# EAGLE board emonDCduo-ESP v4.1 (EAGLE 9.4.0)
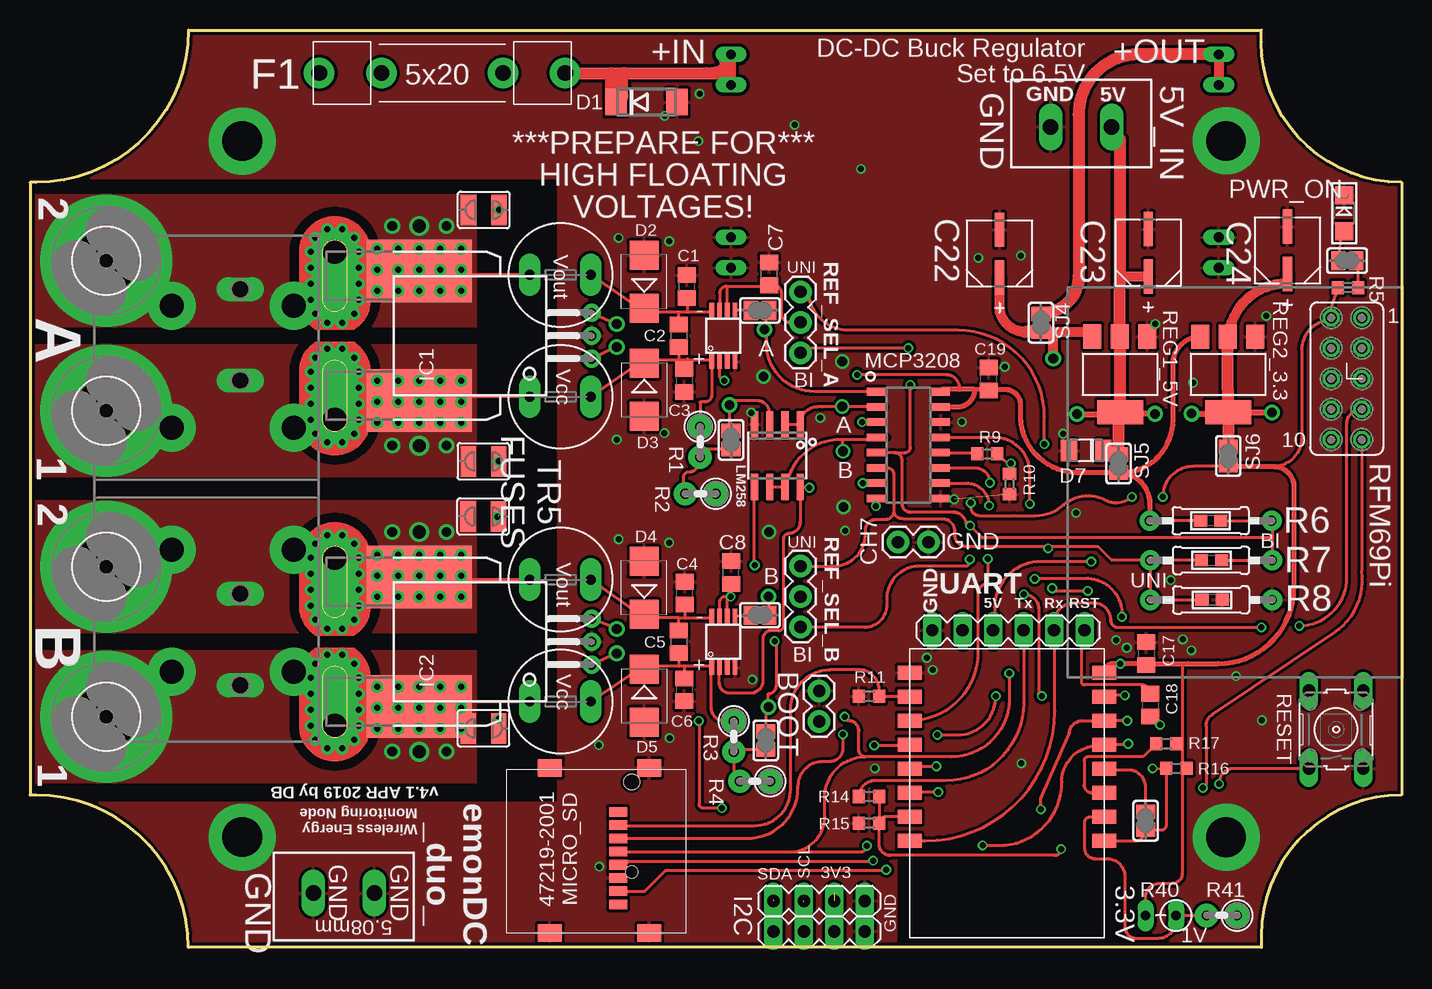
[diagram p0: board, top side]
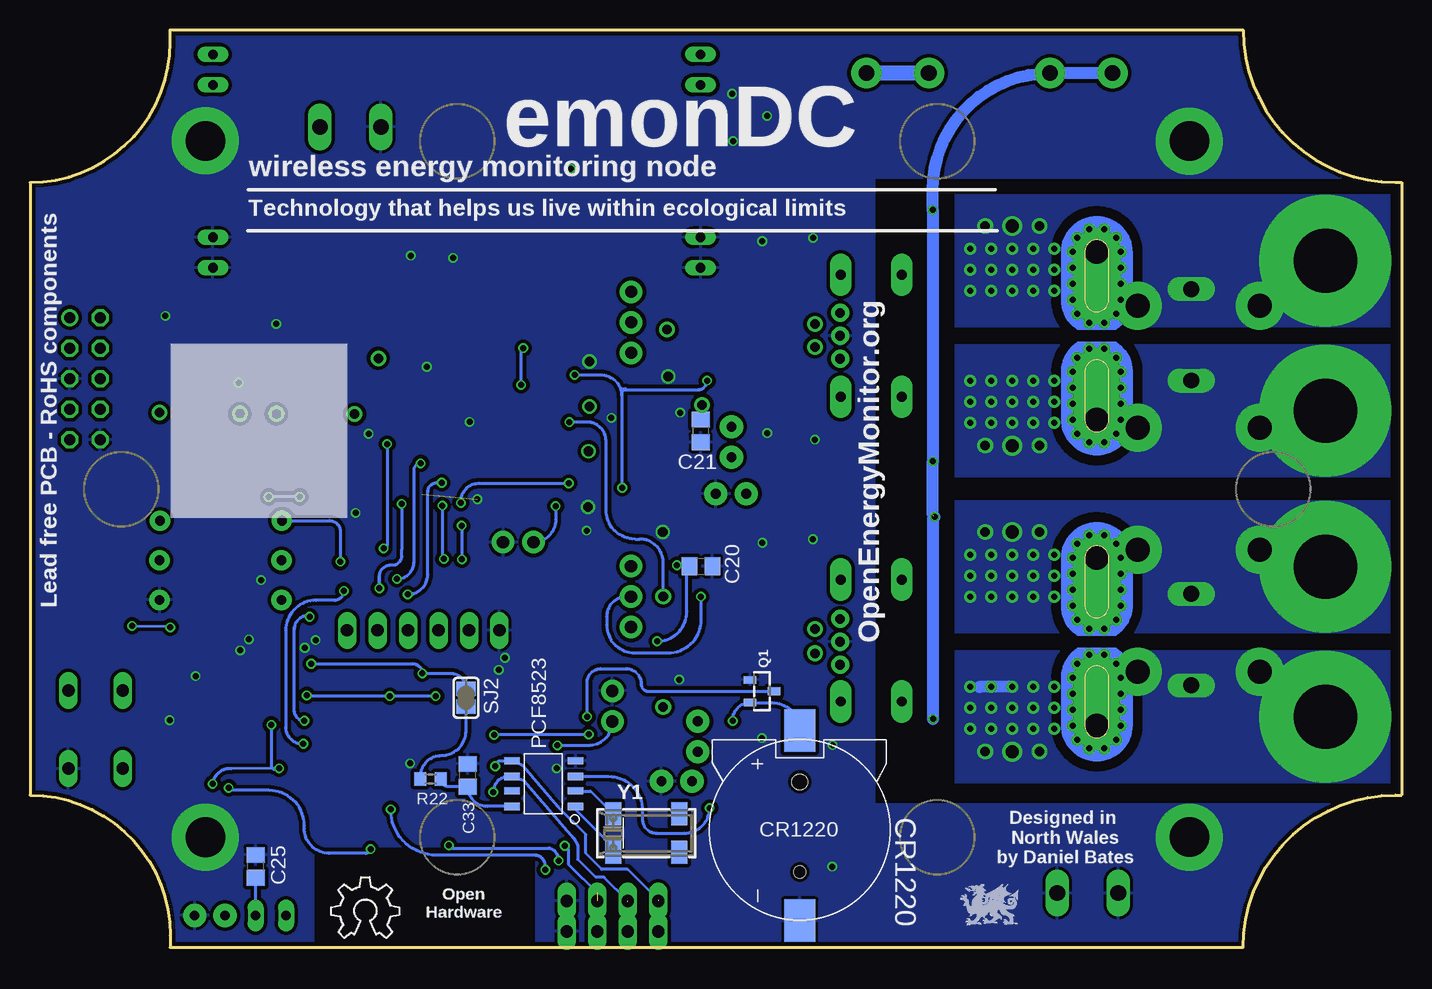
[diagram p1: board, bottom side, seen from below]

Size 114.3 x 76.45 mm. Coordinates in mm from the lower left corner, seen from the top.
Outline: 0,63.75 0,12.7 0.51,12.7 arc-90 13.21,0 102.62,0 102.62,1.02 arc-90 114.3,12.7 114.3,63.75 arc-90 102.62,75.44 102.62,76.45 13.21,76.45 arc-90 0.51,63.75 0,63.75
Copper layers (1*16): Top 0.07111875mm / dielectric 1.45776875mm / Bottom 0.07111875mm
Design rules "jlcpcb *": minimum track width 6mil, minimum drill 12mil, track to track 10mil, track to pad 10mil, pad to pad 10mil, via to via 10mil, smd to smd 0mil, copper to edge 10mil, drill to drill 10mil, minimum pad ring 10mil, minimum via ring 6mil, stop-mask expansion 2mil, vias tented up to drill 25mil, thermal gap 10mil
Net classes: 0 default: clearance 0.254 mm; 1 power: width 0.254 mm, clearance 0.254 mm; 2 thin_power: width 0.254 mm, clearance 0.254 mm; 3 thin_power2: width 0.254 mm, clearance 0.254 mm; 4 HV: clearance 0.762 mm
tRestrict: area 72.5,0.5 to 90.3,8.1
bRestrict: area 72.5,0.4 to 90.3,8

## Footprints (pad centres in the part's own frame; a part is rotated, then mirrored left to right if it is on the bottom)
1X02 = drill 1.016 pad 1.88: 1 0,0; 2 2.54,0
C0805 = smd 1.3 x 1.5: 1 -0.95,0; 2 0.95,0
CAPAE530X610N = smd 2.87 x 0.762: 1 -1.981,0; 2 1.981,0
CR1220SMD = smd 3.54 x 2.6: P+ 8.3,0; P- -7.55,0 | hole 1: -3.5,0 | hole 1.3: 4,0
DO214AA = smd 1.8 x 2.2: A 2.55,0; C -2.55,0
SMB = smd 2.4 x 2.4: A 2.2,0; C -2.2,0
SOD123F = smd 1.34 x 1.8: A 1.43,0; C -1.43,0
EBW_SERIES_15.2MM = smd 5.2 x 8.75: P$1 -5.4,0; P$2 5.4,0 | drill 0.5: P$3 -3.75,3.5; P$4 -3.75,1.75; P$5 -3.75,0; P$6 -3.75,-1.75; P$7 -3.75,-3.5; P$8 -5.5,3.5; P$9 -5.5,1.75; P$10 -5.5,0; P$11 -5.5,-1.75; P$12 -5.5,-3.5; P$13 -7.25,3.5; P$14 -7.25,1.75; P$15 -7.25,0; P$16 -7.25,-1.75; P$17 -7.25,-3.5; P$18 7.25,1.75; P$19 7.25,3.5; P$20 7.25,0; P$21 7.25,-1.75; P$22 7.25,-3.5; P$23 5.5,3.5; P$24 5.5,1.75; P$25 5.5,0; P$26 5.5,-1.75; P$27 5.5,-3.5; P$28 3.75,3.5; P$29 3.75,1.75; P$30 3.75,0; P$31 3.75,-1.75; P$32 3.75,-3.5 | drill 0.8: P$33 -9.155,2.258; P$35 -9.155,-2.258; P$36 9.155,2.258; P$38 9.155,-2.258 | drill 1.1: P$34 -9.155,0; P$37 9.155,0
ESP8266-ESP12 = smd 2 x 1.2: 1 16.2,2; 2 16.2,4; 3 16.2,6; 4 16.2,8; 5 16.2,10; 6 16.2,12; 7 16.2,14; 8 16.2,16; 9 0,16; 10 0,14; 11 0,12; 12 0,10; 13 0,8; 14 0,6; 15 0,4; 16 0,2
445/030_SERIES_LITTELFUSE = drill 1.3 pad 2.54: P$1 -10.25,0; P$2 -5.05,0; P$3 10.25,0; P$4 5.05,0
TR5 = drill 0.813 pad 1.778 long: 1 -2.54,0; 2 2.54,0
FE05-2_RFM69PI_OULTINE = drill 0.914: 1 24.511,29.972 | drill 0.914 octagon: 2 21.971,29.972; 3 24.511,27.432; 4 21.971,27.432; 5 24.511,24.892; 6 21.971,24.892; 7 24.511,22.352; 8 21.971,22.352; 9 24.511,19.812; 10 21.971,19.812
ACS75050 = drill 0.8 pad 1.5: 1 -1.91,-21.4; 2 0,-21.4; 3 1.91,-21.4 | drill 2 pad 4 offset: IP+ 7,0; IP- -7,0 | drill 0.5 pad 0.9: IP+@2 8.89,-0.635; IP+@3 8.89,0.635; IP+@4 8.175,1.625; IP+@5 7,2; IP+@6 5.675,2; IP+@7 4.325,2; IP+@8 3,2; IP+@9 1.825,1.625; IP+@10 1.1,0.625; IP+@11 1.1,-0.625; IP+@12 1.825,-1.625; IP+@13 3,-2; IP+@14 4.325,-2; IP+@15 5.675,-2; IP+@16 7,-2; IP+@17 8.175,-1.625; IP-@2 -8.89,-0.635; IP-@3 -8.89,0.635; IP-@4 -8.175,1.625; IP-@5 -7,2; IP-@6 -5.675,2; IP-@7 -4.325,2; IP-@8 -3,2; IP-@9 -1.825,1.625; IP-@10 -1.1,0.625; IP-@11 -1.1,-0.625; IP-@12 -1.825,-1.625; IP-@13 -3,-2; IP-@14 -4.35,-2; IP-@15 -5.675,-2; IP-@16 -7,-2; IP-@17 -8.175,-1.625
CHIPLED_1206 = smd 1.5 x 1.5: A 0,-1.496; C 0,1.496
SOIC8_150MIL = smd 0.6 x 2.2: 1 -1.905,-2.6; 2 -0.635,-2.6; 3 0.635,-2.6; 4 1.905,-2.6; 5 1.905,2.6; 6 0.635,2.6; 7 -0.635,2.6; 8 -1.905,2.6
SOIC16 = smd 0.635 x 1.524: 1 -4.445,-2.695; 2 -3.175,-2.695; 3 -1.905,-2.695; 4 -0.635,-2.695; 5 0.635,-2.695; 6 1.905,-2.695; 7 3.175,-2.695; 8 4.445,-2.695; 9 4.445,2.695; 10 3.175,2.695; 11 1.905,2.695; 12 0.635,2.695; 13 -0.635,2.695; 14 -1.905,2.695; 15 -3.175,2.695; 16 -4.445,2.695
5,3//11-PAD = drill 5.3 pad 11: B5,5 0,0
47219-2001_MICROSD = smd 1.45 x 2: P$1 0,0; P$2 13.75,0; P$3 0,8.3; P$4 13.75,8.3 | smd 0.8 x 1.5: PIN1 10.08,2.6; PIN2 8.98,2.6; PIN3 7.88,2.6; PIN4 6.78,2.6; PIN5 5.68,2.6; PIN6 4.58,2.6; PIN7 3.48,2.6; PIN8 2.38,2.6
2/10,16 = drill 2 pad 4: P$1 -5.08,0; P$2 -5.08,10.16; P$3 5.08,0; P$4 5.08,10.16
SOIC_8 = smd 1.3 x 0.6: 1 -2.6,1.9; 2 -2.6,0.6; 3 -2.6,-0.6; 4 -2.6,-1.9; 5 2.7,-1.9; 6 2.7,-0.6; 7 2.7,0.6; 8 2.7,1.9
SOT23-R = smd 0.635 x 1.016: 1 -0.95,-1; 2 0.95,-1; 3 0,1
0207/2V = drill 0.813 pad 1.93: 1 -1.27,0; 2 1.27,0
R0603 = smd 1 x 1.1: 1 -0.85,0; 2 0.85,0
0207/10 = drill 0.813 pad 1.676: 1 -5.08,0; 2 5.08,0
0603 = smd 1.1 x 1: 1 -0.85,0; 2 0.85,0
RS-2,5 = drill 0.813 long: 1 -1.27,0; 2 1.27,0
1X03 = drill 1.016 pad 1.88: 1 0,0; 2 2.54,0; 3 5.08,0
SOT223 = smd 1.499 x 2.007: 1 -2.261,-3.15; 2 0.025,-3.15; 3 2.311,-3.15 | smd 3.81 x 2.007: 4 0,3.15
B3F-10XX = drill 1.016 long: 1 -3.251,2.261; 2 3.251,2.261; 3 -3.251,-2.261; 4 3.251,-2.261
S-PDSO-G08 = smd 0.4 x 1.2: 1 -0.975,-2.157; 2 -0.325,-2.157; 3 0.325,-2.157; 4 0.975,-2.157; 5 0.975,2.157; 6 0.325,2.157; 7 -0.325,2.157; 8 -0.975,2.157
SJW = smd 1.27 x 2.54: 1 -1.27,0; 2 1.27,0
SOLDERJUMPER_CLOSEDWIRE = smd 1.168 x 1.6: 1 -0.762,0; 2 0.762,0 | smd 0.635 x 0.203: WIRE 0,0
MA04-1 = drill 1.016 long: 1 -3.81,0; 2 -1.27,0; 3 1.27,0; 4 3.81,0
P1-13Y = drill 1.321 pad 1.905 long: TP 0,0
TP0.8 = drill 0.8: P$1 0,0
TP0.8_X2 = drill 0.8 long: P$1 0,0; P$2 0,2.54
2/5.08 = drill 1.3 long: P$1 -2.54,0; P$3 2.54,0
MA06-1 = drill 1.016 long: 1 0,0; 2 2.54,0; 3 5.08,0; 4 7.62,0; 5 10.16,0; 6 12.7,0
CRYSTAL_8X3.8 = smd 1.3 x 1.9: P$1 -2.75,-1.6; P$2 2.75,-1.6; P$3 2.75,1.6; P$4 -2.75,1.6

## Placement (x,y rotation side)
BOOT  [1X02]  65.77,21.37 270 top
C1  0.1uF 100V  [C0805]  54.75,55.08 90 top
C2  1nF 100V  [C0805]  54.07,50.97 270 top
C3  0.1uF 100V  [C0805]  54.51,47.25 270 top
C4  0.1uF 100V  [C0805]  54.56,29.53 90 top
C5  1nF 100V  [C0805]  54.05,25.47 270 top
C6  0.1uF 100V  [C0805]  54.53,21.47 270 top
C7  0.1uF 100V  [C0805]  61.59,56.13 90 top
C8  0.1uF 100V  [C0805]  58.42,31.24 90 top
C17  0.1uF  [C0805]  93.03,24.49 270 top
C18  0.1uF  [C0805]  93.34,20.19 270 top
C19  0.1uF  [C0805]  79.9,47.36 90 top
C20  1nF 100V  [C0805]  58.38,31.77 0 bottom
C21  1nF 100V  [C0805]  58.42,43.05 270 bottom
C22  100UF  [CAPAE530X610N]  80.79,57.83 90 top
C23  100UF  [CAPAE530X610N]  93.18,57.89 90 top
C24  100UF  [CAPAE530X610N]  104.79,58.08 90 top
C25  0.1uF  [C0805]  95.5,6.76 90 bottom
C33  4.7uF  [C0805]  77.82,14.34 90 bottom
CR1220  CR1220SMD  [CR1220SMD]  50.15,9.79 90 bottom
D1  P6SMB75A  [DO214AA]  51.37,70.44 0 top
D2  P6SMB75A  [SMB]  51.18,55.47 90 top
D3  P6SMB75A  [SMB]  51.18,46.47 270 top
D4  P6SMB75A  [SMB]  51.18,29.97 90 top
D5  P6SMB75A  [SMB]  51.18,20.97 270 top
D7  SMF6.0A  [SOD123F]  88.01,41.4 180 top
EBW_A  EBW_SERIES_15.2MM  [EBW_SERIES_15.2MM]  32.44,25.47 90 top
EBW_B  EBW_SERIES_15.2MM  [EBW_SERIES_15.2MM]  32.44,50.97 90 top
ESP-12  ESP8266_ESP-12  [ESP8266-ESP12]  89.5,24.89 180 top
F1  445/030_SERIES  [445/030_SERIES_LITTELFUSE]  34.35,72.87 0 top
F2  [TR5]  44.2,56.05 0 top
F3  [TR5]  44.2,45.89 0 top
F4  [TR5]  44.2,30.65 0 top
F5  [TR5]  44.2,20.49 0 top
GPIO_1  [FE05-2_RFM69PI_OULTINE]  86.47,22.51 0 top
IC1  ACS750LCA-050  [ACS75050]  25.4,50.97 90 top
IC2  ACS750LCA-050  [ACS75050]  25.4,25.47 90 top
J5  [1X02]  72.34,33.77 0 top
LED1  PWR_ON  [CHIPLED_1206]  109.51,61.2 0 top
LM258  [SOIC8_150MIL]  62.27,40.98 180 top
LOGO1  OSHW_LOGO_6MILX0200-NT  [OSHW_6X200_NOTEXT]  89.2,0.78 0 bottom
MCP3208  MCP3208-BI/SL  [SOIC16]  73.21,41.87 270 top
MH1  5.3mm  [5,3//11-PAD]  6.35,44.72 0 top
MH2  5.3mm  [5,3//11-PAD]  6.35,57.22 0 top
MH3  5.3mm  [5,3//11-PAD]  6.35,19.22 0 top
MH4  5.3mm  [5,3//11-PAD]  6.35,31.72 0 top
MICRO_SD  47219-2001_MICROSD  [47219-2001_MICROSD]  51.62,1.21 90 top
MOUNT_10.16_A  MOLEX_39970-003  [2/10,16]  11.81,48.39 270 top
MOUNT_10.16_B  MOLEX_39970-003  [2/10,16]  11.81,28.07 270 top
PCF8523  PCF8523_RTC  [SOIC_8]  71.43,13.65 180 bottom
Q1  [SOT23-R]  53.3,21.35 270 bottom
R1  1M 100V  [0207/2V]  55.84,42.13 270 top
R2  56K  [0207/2V]  55.87,37.81 180 top
R3  1M 100V  [0207/2V]  58.65,17.58 270 top
R4  56K  [0207/2V]  60.41,13.85 180 top
R5  174R  [R0603]  109.83,54.98 180 top
R6  10k  [0207/10]  98.39,35.56 180 top
R7  3.3k  [0207/10]  98.42,32.26 0 top
R8  180R  [0207/10]  98.42,28.96 180 top
R9  1K  [R0603]  79.77,41.14 0 top
R10  2K  [R0603]  81.63,38.62 270 top
R11  10K  [R0603]  69.91,20.93 180 top
R14  1k  [R0603]  69.93,12.57 0 top
R15  2k  [R0603]  69.92,10.35 180 top
R16  10K  [R0603]  95.53,14.92 0 top
R17  10K  [R0603]  94.69,16.98 0 top
R22  1K  [R0603]  80.91,14.04 180 bottom
R25  10k  [0603]  98.39,35.56 180 top
R26  3.3k  [0603]  98.46,32.26 0 top
R27  180R  [0603]  98.51,28.96 180 top
R40  THERMISTOR-2,5  [RS-2,5]  94.23,2.67 180 top
R41  [0207/2V]  99.31,2.67 180 top
REF_SEL_A  455-1750-1-ND  [1X03]  64.21,54.63 270 top
REF_SEL_B  455-1750-1-ND  [1X03]  64.21,31.78 270 top
REG1_5V  REG1117-5.0V  [SOT223]  90.85,47.76 180 top
REG2_3.3  REG1117-3.3V  [SOT223]  99.85,47.75 180 top
RESET  RESET_BUTT  [B3F-10XX]  108.84,18.16 90 top
SHUNTMON-A  LMP8481  [S-PDSO-G08]  57.78,50.97 0 top
SHUNTMON-B  LMP8481  [S-PDSO-G08]  57.78,25.47 0 top
SJ1  [SJW]  37.82,61.46 0 top
SJ2  [SOLDERJUMPER_CLOSEDWIRE]  77.96,20.8 270 bottom
SJ3  [SJW]  37.79,40.51 180 top
SJ4  [SOLDERJUMPER_CLOSEDWIRE]  84.24,52.06 270 top
SJ5  [SOLDERJUMPER_CLOSEDWIRE]  90.72,40.32 270 top
SJ6  [SOLDERJUMPER_CLOSEDWIRE]  99.85,40.95 270 top
SJ7  [SJW]  37.79,18.26 0 top
SJ8  [SOLDERJUMPER_CLOSEDWIRE]  58.42,42.3 90 top
SJ9  [SOLDERJUMPER_CLOSEDWIRE]  61.32,17.25 90 top
SJ10  [SOLDERJUMPER_CLOSEDWIRE]  60.83,27.69 0 top
SJ11  [SOLDERJUMPER_CLOSEDWIRE]  60.83,53.09 0 top
SJ12  [SOLDERJUMPER_CLOSEDWIRE]  92.97,10.56 270 top
SJ13  [SOLDERJUMPER_CLOSEDWIRE]  109.76,57.23 180 top
SJ14  [SJW]  37.77,35.92 0 top
SV1  [MA04-1]  65.76,3.87 0 top
SV2  [MA04-1]  65.76,1.33 0 top
TP8  TPPAD1-13Y  [P1-13Y]  17.53,21.84 90 top
TP9  TPPAD1-13Y  [P1-13Y]  17.53,29.46 90 top
TP10  TPPAD1-13Y  [P1-13Y]  17.53,47.24 90 top
TP11  TPPAD1-13Y  [P1-13Y]  17.53,54.86 270 top
U$1  TP0.8MM  [TP0.8]  58.29,45.21 0 top
U$2  2212S-02SG-85  [TP0.8_X2]  58.42,71.88 0 top
U$3  2212S-02SG-85  [TP0.8_X2]  99.06,56.64 0 top
U$4  TP0.8MM  [TP0.8]  61.54,20.05 0 top
U$5  TP0.8MM  [TP0.8]  61.53,29.25 0 top
U$6  TP0.8MM  [TP0.8]  61.21,51.48 0 top
U$7  TP0.8MM  [TP0.8]  87.25,44.45 0 top
U$8  TP0.8MM  [TP0.8]  103.5,44.58 0 top
U$9  TP0.8MM  [TP0.8]  85.27,49.09 0 top
U$10  2212S-02SG-85  [TP0.8_X2]  99.06,71.88 0 top
U$11  2212S-02SG-85  [TP0.8_X2]  58.42,56.64 0 top
U$12  5MMBLOCK  [2/5.08]  87.59,68.38 180 top
U$13  5MMBLOCK  [2/5.08]  26.15,4.53 0 top
U$14  TP0.8MM  [TP0.8]  48.9,26.54 0 top
U$15  TP0.8MM  [TP0.8]  48.9,24.51 0 top
U$16  TP0.8MM  [TP0.8]  48.9,51.94 0 top
U$17  TP0.8MM  [TP0.8]  48.9,50.04 0 top
U$18  TP0.8MM  [TP0.8]  93.76,44.47 0 top
U$19  TP0.8MM  [TP0.8]  96.81,44.48 0 top
U$20  [DRAGON_LOGO_NOTEXT]  34.19,3.53 0 bottom
UART  UART  [MA06-1]  87.88,26.42 180 top
Y1  32Khz  [CRYSTAL_8X3.8]  62.95,9.54 0 bottom

## Library data of the parts
BOOT = SparkFun
C1-C8 C20 C21 = rcl; MPN: C1608X7S2A104K080AB; SPICEPREFIX: C
C17-C19 C25 C33 = rcl; SPICEPREFIX: C
C22-C24 = Panasonic-EEE0_EEE1_EEE2_EEEFC; MPN: EEE-0JA101WAR; OC_FARNELL: 2284723; OC_NEWARK: 53W3731; PACKAGE: CASE-C; SUPPLIER: PANASONIC; TOLERANCE: 20%; VOLTAGERATING: 6.3V
CR1220 = IotaWatt_parts; MPN: Harwin S8411-45R
D1-D5 = diode
D7 = smf_10; MF: Littelfuse; MPN: SMF6.0A; OC_FARNELL: unknown; OC_NEWARK: unknown
EBW_A EBW_B = EBW series SHUNT
ESP-12 = ESP8266-ESP12
F1 = LITTELFUSE 455:030 SERIES
F2-F5 = fuse_db; MF: LITTELFUSE; MPN: 56000001009; OC_FARNELL: 1185363; OC_NEWARK: unknown
GPIO_1 = con-lsta-RFM69Pi
IC1 IC2 = allegro; MF: ALLEGRO MICROSYSTEMS, INC.; MPN: ACS750LCA-050; OC_FARNELL: 1457176; OC_NEWARK: 61H4464
J5 = SparkFun-Connectors
LED1 LM258 Q1 R25-R27 SJ2 SJ4-SJ6 SJ8-SJ13 Y1 = microbuilder
LOGO1 = ohw-logo; OC_FARNELL: unknown
MCP3208 = MCP3208
MH1-MH4 = holes-db
MICRO_SD = MOLEX 47219-2001
MOUNT_10.16_A MOUNT_10.16_B = 10.16mm terminal block
PCF8523 = emonDC parts
R1 R3 = rcl7; MPN: MCMF006FF1004A50; OC_FARNELL: 2401833RL
R2 R4 = rcl7; MPN: MCMF006FF7502A50; OC_FARNELL: 2401804RL
R5 = rcl; SPICEPREFIX: R
R6-R8 R41 = rcl7
R9 R10 = rcl; MPN: MCWR06X5901FTL
R11 R14-R17 = rcl
R22 = rcl@1
R40 = varistor
REF_SEL_A REF_SEL_B = SparkFun-Connectors; MF: MULTICOMP; MPN: 2212S-02SG-85; OC_FARNELL: 1593458; PROD_ID: XXX-00000
REG1_5V = burr-brown-db; MF: TEXAS INSTRUMENTS; MPN: REG1117-5.0; OC_FARNELL: 1097566; OC_NEWARK: 14P6981
REG2_3.3 = burr-brown-db; MF: TEXAS INSTRUMENTS; MPN: REG1117-3.3; OC_FARNELL: 1097566; OC_NEWARK: 14P6981
RESET = switch-omron; MPN: FSM4JH; OC_FARNELL: 155598
SHUNTMON-A = lmp8481b; MF: TEXAS INSTRUMENTS; MPN: LMP8481MME-S/NOPB; OC_FARNELL: 2322044
SHUNTMON-B = lmp8481b; DIGIKEY_PART: 296-37196-1-ND; MF: TEXAS INSTRUMENTS; MPN: LMP8481MME-H/NOPB; OC_FARNELL: 2322044
SJ1 SJ3 SJ7 SJ14 = jumper
SV1 SV2 = con-lstb-db; MF: MULTICOMP; MPN: 2212S-04SG-85; OC_FARNELL: 1593460; OC_NEWARK: unknown
TP8-TP11 = testpad
U$1 U$4-U$9 U$14-U$19 = testpad_db
U$2 U$3 U$10 U$11 = testpad_db; MPN: 2212S-02SG-85
U$12 U$13 = 5mm terminal block; MF: LUMBERG; MPN: KRM_02; OC_FARNELL: 1177875
U$20 = DRAGON_LOGO
UART = JeeLabs

## Nets
3.3V_PRE [thin_power]: C24.1 REG2_3.3.2 REG2_3.3.4 SJ6.1 U$8.P$1 U$19.P$1
5V_PRE [thin_power]: C23.1 D7.C REG1_5V.2 REG1_5V.4 SJ5.1 U$7.P$1 U$12.P$1 U$18.P$1
6.5V [thin_power]: C22.1 REG1_5V.3 SJ4.2 U$9.P$1
+3V3 [thin_power2]: C17.2 ESP-12.16 GPIO_1.2 MCP3208.7 MICRO_SD.PIN4 Q1.3 R5.2 R16.2 R17.2 R40.2 SJ2.1 SJ6.2 SV1.3 SV2.3
+5V [thin_power2]: C19.1 LM258.8 MCP3208.15 MCP3208.16 R6.2 R25.2 REG2_3.3.3 SHUNTMON-A.2 SHUNTMON-B.2 SJ5.2 UART.4
_RESET: GPIO_1.8
ADC: C25.1 ESP-12.10 R40.1 R41.2
ADCSHUNT_A: MCP3208.1 SJ11.2 U$6.P$1
ADCSHUNT_B: MCP3208.3 SJ10.2 U$5.P$1
BI_REF: MCP3208.5 R6.1 R7.2 R25.1 R26.2 REF_SEL_A.3 REF_SEL_B.3
CH7: J5.1 MCP3208.8
CH_PD: ESP-12.11 R17.1
D0/RX: ESP-12.8 GPIO_1.7 UART.2
D1/TX: ESP-12.7 GPIO_1.9 R14.2 R15.1
GND: BOOT.1 C1.2 C3.2 C4.2 C6.2 C7.2 C8.2 C17.1 C19.2 C20.2 C21.2 C22.2 C23.2 C24.2 C25.2 C33.2 CR1220.P- D1.A D2.A D3.A D4.A D5.A D7.A ESP-12.1 GPIO_1.5 GPIO_1.10 IC1.2 IC2.2 J5.2 LED1.C LM258.4 MCP3208.9 MCP3208.14 MICRO_SD.P$1 MICRO_SD.P$2 MICRO_SD.P$3 MICRO_SD.P$4 MICRO_SD.PIN6 PCF8523.4 Q1.1 R2.1 R4.1 R8.1 R10.2 R11.2 R15.2 R27.1 R41.1 REG1_5V.1 REG2_3.3.1 RESET.3 SHUNTMON-A.4 SHUNTMON-B.4 SV1.4 SV2.4 U$3.P$1 U$3.P$2 U$11.P$1 U$11.P$2 U$12.P$3 U$13.P$1 U$13.P$3 UART.6
GPIO0: BOOT.2 ESP-12.4
GPIO2: ESP-12.3 MCP3208.10
GPIO12: ESP-12.14 MICRO_SD.PIN7 R9.2 R10.1
GPIO12A: MCP3208.12 R9.1
GPIO13: ESP-12.15 MCP3208.11 MICRO_SD.PIN3
GPIO14: ESP-12.13 MCP3208.13 MICRO_SD.PIN5
GPIO15: ESP-12.2 MICRO_SD.PIN2 R11.1
GPIO16: ESP-12.12 SJ12.1
LOAD-NEG-A [HV]: EBW_B.P$2 EBW_B.P$18 EBW_B.P$19 EBW_B.P$20 EBW_B.P$21 EBW_B.P$22 EBW_B.P$23 EBW_B.P$24 EBW_B.P$25 EBW_B.P$26 EBW_B.P$27 EBW_B.P$28 EBW_B.P$29 EBW_B.P$30 EBW_B.P$31 EBW_B.P$32 EBW_B.P$36 EBW_B.P$37 EBW_B.P$38 F2.1 IC1.IP+ IC1.IP+@2 IC1.IP+@3 IC1.IP+@4 IC1.IP+@5 IC1.IP+@6 IC1.IP+@7 IC1.IP+@8 IC1.IP+@9 IC1.IP+@10 IC1.IP+@11 IC1.IP+@12 IC1.IP+@13 IC1.IP+@14 IC1.IP+@15 IC1.IP+@16 IC1.IP+@17 MH2.B5,5 MOUNT_10.16_A.P$1 MOUNT_10.16_A.P$2 SJ1.1 TP11.TP
LOAD-NEG-A_T [thin_power]: C1.1 C2.1 D2.C F2.2 SHUNTMON-A.8
LOAD-NEG-B [HV]: EBW_A.P$2 EBW_A.P$18 EBW_A.P$19 EBW_A.P$20 EBW_A.P$21 EBW_A.P$22 EBW_A.P$23 EBW_A.P$24 EBW_A.P$25 EBW_A.P$26 EBW_A.P$27 EBW_A.P$28 EBW_A.P$29 EBW_A.P$30 EBW_A.P$31 EBW_A.P$32 EBW_A.P$36 EBW_A.P$37 EBW_A.P$38 F4.1 IC2.IP+ IC2.IP+@2 IC2.IP+@3 IC2.IP+@4 IC2.IP+@5 IC2.IP+@6 IC2.IP+@7 IC2.IP+@8 IC2.IP+@9 IC2.IP+@10 IC2.IP+@11 IC2.IP+@12 IC2.IP+@13 IC2.IP+@14 IC2.IP+@15 IC2.IP+@16 IC2.IP+@17 MH4.B5,5 MOUNT_10.16_B.P$1 MOUNT_10.16_B.P$2 SJ14.1 TP9.TP
LOAD-NEG-B_T [thin_power]: C4.1 C5.1 D4.C F4.2 SHUNTMON-B.8
N$1: C18.1 UART.1
N$5: R5.1 SJ13.1
N$6: LED1.A SJ13.2
N$7: MICRO_SD.PIN1
N$10: SHUNTMON-B.5 SJ10.1
N$11: SHUNTMON-A.5 SJ11.1
N$32: MICRO_SD.PIN8
N$36: R14.1 UART.3
N$44: PCF8523.2 Y1.P$4
N$45: PCF8523.1 Y1.P$1
REF_A_INPUT: C7.1 REF_SEL_A.2 SHUNTMON-A.6 SHUNTMON-A.7
REF_B_INPUT: C8.1 REF_SEL_B.2 SHUNTMON-B.6 SHUNTMON-B.7
RST: C18.2 ESP-12.9 R16.1 RESET.1 SJ12.2
SCL: ESP-12.6 PCF8523.6 SV1.2 SV2.2
SDA: ESP-12.5 PCF8523.5 SV1.1 SV2.1
SOURCE-POS-A [HV]: EBW_B.P$1 EBW_B.P$3 EBW_B.P$4 EBW_B.P$5 EBW_B.P$6 EBW_B.P$7 EBW_B.P$8 EBW_B.P$9 EBW_B.P$10 EBW_B.P$11 EBW_B.P$12 EBW_B.P$13 EBW_B.P$14 EBW_B.P$15 EBW_B.P$16 EBW_B.P$17 EBW_B.P$33 EBW_B.P$34 EBW_B.P$35 F3.1 IC1.IP- IC1.IP-@2 IC1.IP-@3 IC1.IP-@4 IC1.IP-@5 IC1.IP-@6 IC1.IP-@7 IC1.IP-@8 IC1.IP-@9 IC1.IP-@10 IC1.IP-@11 IC1.IP-@12 IC1.IP-@13 IC1.IP-@14 IC1.IP-@15 IC1.IP-@16 IC1.IP-@17 MH1.B5,5 MOUNT_10.16_A.P$3 MOUNT_10.16_A.P$4 SJ3.2 TP10.TP
SOURCE-POS-A_T [thin_power]: C2.2 C3.1 D3.C F3.2 R1.1 SHUNTMON-A.1
SOURCE-POS-B [HV]: EBW_A.P$1 EBW_A.P$3 EBW_A.P$4 EBW_A.P$5 EBW_A.P$6 EBW_A.P$7 EBW_A.P$8 EBW_A.P$9 EBW_A.P$10 EBW_A.P$11 EBW_A.P$12 EBW_A.P$13 EBW_A.P$14 EBW_A.P$15 EBW_A.P$16 EBW_A.P$17 EBW_A.P$33 EBW_A.P$34 EBW_A.P$35 F5.1 IC2.IP- IC2.IP-@2 IC2.IP-@3 IC2.IP-@4 IC2.IP-@5 IC2.IP-@6 IC2.IP-@7 IC2.IP-@8 IC2.IP-@9 IC2.IP-@10 IC2.IP-@11 IC2.IP-@12 IC2.IP-@13 IC2.IP-@14 IC2.IP-@15 IC2.IP-@16 IC2.IP-@17 MH3.B5,5 MOUNT_10.16_B.P$3 MOUNT_10.16_B.P$4 SJ7.1 TP8.TP
SOURCE-POS-B_T [thin_power]: C5.2 C6.1 D5.C F5.2 R3.1 SHUNTMON-B.1
UNI_REF: MCP3208.6 R7.1 R8.2 R26.1 R27.2 REF_SEL_A.1 REF_SEL_B.1
V_IN_POSTFUSE [HV]: D1.C F1.P$3 F1.P$4 U$2.P$1 U$2.P$2
V_IN_PREFUSE [HV]: F1.P$1 F1.P$2 SJ1.2 SJ3.1 SJ7.2 SJ14.2
VBAT: CR1220.P+ PCF8523.3 Q1.2
VCC_ACS_A: IC1.1 U$17.P$1
VCC_ACS_B: IC2.1 U$15.P$1
VDD_PCF: C33.1 PCF8523.8 R22.1
VDD_RTC_POSTJUMPER: R22.2 SJ2.2
VOUT_ACS_A: IC1.3 U$16.P$1
VOUT_ACS_B: IC2.3 U$14.P$1
VOUT_POST_SWITCHING: SJ4.1 U$10.P$1 U$10.P$2
VSENSE_A: R1.2 R2.2 SJ8.1
VSENSE_A_BUFFED: LM258.1 LM258.2 MCP3208.2
VSENSE_A_TP: C21.1 LM258.3 SJ8.2 U$1.P$1
VSENSE_B: R3.2 R4.2 SJ9.1
VSENSE_B_BUFFED: LM258.6 LM258.7 MCP3208.4
VSENSE_B_TP: C20.1 LM258.5 SJ9.2 U$4.P$1

## Tracks (layer width: path | path; a pad name or v marks a point on that pad's centre or on a via)
3.3V_PRE
  Top 0.254: U$8.P$1 103.29,44.58
  Top 0.406: 99.82,50.39 REG2_3.3.2 99.82,50.92 | 99.82,46.48 99.82,45.21 99.82,44.63 | 99.82,44.63 REG2_3.3.4 99.99,44.46 99.85,44.46 SJ6.1 | 99.68,44.48 99.82,44.63
  Top 0.508: 103.24,44.63 arc90 103.29,44.58 100.38,44.58 100.33,44.63 | U$19.P$1 99.73,44.48 REG2_3.3.4
  Top 0.813: C24.1 104.79,55.35 arc90 99.82,50.39
  Top 1.016: 100.33,44.63 99.82,44.63 99.82,46.48 99.82,50.39 | SJ6.1 REG2_3.3.4 99.85,45.19 arc90 99.82,45.21
5V_PRE
  Top 0.406: REG1_5V.2 90.88,50.86 | 90.45,44.21 REG1_5V.4 | SJ5.1 90.7,41.1 90.67,42.16 | 90.67,42.16 90.62,44.31 90.17,44.31 | D7.C 89.69,41.4 90.01,41.08 90.01,41.37 90.67,42.03 90.67,42.16
  Top 0.508: REG1_5V.2 90.8,50.94 | 90.03,44.45 arc-90 90.17,44.31 | REG1_5V.4 90.85,44.54 | 90.85,44.54 arc-90 90.62,44.31 | U$7.P$1 90.76,44.45 90.85,44.54 | U$18.P$1 90.93,44.47 90.85,44.54
  Top 0.813: C23.1 90.82,55.91 90.82,55.37
  Top 1.016: SJ5.1 90.72,44.21 arc90 90.62,44.31 | 90.45,44.21 90.82,44.59 REG1_5V.2 90.82,55.37 90.82,67.34 arc-90 U$12.P$1
6.5V
  Top 0.508: REG1_5V.3 88.48,50.96
  Top 0.813: 82.93,51.31 arc-90 80.79,53.45 C22.1 | SJ4.2 85.09,51.3 | 85.09,51.3 88.15,51.3 arc-90 REG1_5V.3 | U$9.P$1 85.27,51.12 arc90 85.09,51.3
  Top 1.016: SJ4.2 arc90 SJ4.2 82.93,51.31
+3V3  (via drill 0.5)  (1 unrouted)
  Top 0.254: 94.8,23.64 arc-90 94.81,23.64 | 100.24,40.09 96.94,40.09 arc90 v94.4,37.54 | v78.39,37.05 arc-90 78.42,37.02 78.42,36.66 arc90 79.09,35.98 82,35.98 83.82,35.99 arc41 86.15,36.88 arc-70 89.6,37.29 arc70 v91.82,37.55 | v69.4,38.69 MCP3208.7 | v81.6,22.84 81.6,20.71 arc-90 76.78,15.89 69.61,15.89 | 63.28,7.95 49.06,7.95 MICRO_SD.PIN4 | 69.61,15.89 arc90 66.23,12.51 66.23,10.9 arc-90 63.28,7.95 | 108.48,52.52 arc-90 GPIO_1.2 | GPIO_1.2 108.44,52.27 arc90 105.96,49.79 105.96,42.43 arc-90 103.62,40.09 | v67.88,19.24 arc90 68.22,18.89 arc-90 69.07,18.04 69.07,16.43 arc90 69.61,15.89 | 69.61,15.89 69.38,15.89 | R40.2 92.96,4.19 arc-90 94.11,5.33 95.21,5.33 arc90 96.02,6.15 96.02,14.73 | 96.52,23.64 96.02,23.64 96.02,17.27 | 96.02,17.27 96.02,14.73 | R16.2 96.21,14.92 arc90 96.02,14.73 | R17.2 95.72,16.98 arc90 96.02,17.27 | v69.74,8.47 arc-90 69.22,7.95 63.28,7.95 | R5.2 108.44,53.38 GPIO_1.2
  Top 0.406: SJ6.2 arc90 99.95,40.09 100.24,40.09 103.62,40.09 arc-90 105.33,38.37 105.33,29.96 arc-90 99.02,23.64 96.52,23.64 94.81,23.64 93.13,23.64 C17.2 92.93,23.64 v90.86,23.64 90.26,23.64 arc90 ESP-12.16
  Bottom 0.254: v94.4,37.54 94.36,37.58 91.87,37.58 91.84,37.55 v91.82,37.55 | v78.39,37.05 78.39,37.19 arc90 76.9,38.69 v69.4,38.69 arc-90 69.37,38.65 | v90.86,23.64 82.41,23.64 arc90 v81.6,22.84 79.23,22.84 arc90 SJ2.1 | 67.88,20.07 v67.88,19.24 67.88,22.07 arc90 66.7,23.24 64.64,23.24 arc90 63.37,21.97 arc-90 62.74,21.34 52.31,21.34 Q1.3 52.34,21.3 | v69.74,8.47 69.44,8.17 69.44,6.95 67.03,4.55 SV2.3
+5V  (via drill 0.5)
  Top 0.254: v64.95,38.31 65.11,38.38 LM258.8 64.18,35.46 arc-90 63.21,34.49 arc90 62.82,34.1 62.82,26.85 arc-90 62.37,26.4 61.76,26.4 arc90 61.07,25.7 61.07,22.22 arc-90 60.03,21.19 59.69,21.19 59.59,21.19 58.29,21.19 arc-90 57.45,22.03 SHUNTMON-B.2 arc-90 SHUNTMON-B.2 | 77.47,46.61 arc90 76.36,47.72 v68.92,47.72 | SHUNTMON-A.2 57.45,47.66 arc90 v57.87,47.24 | R25.2 R6.2 | v88.44,32.15 84.22,32.15 arc90 80.39,28.32 80.39,26.56 arc-90 UART.4
  Top 0.406: SJ5.2 90.86,39.55 arc90 95.25,43.94 95.25,48.62 arc-90 REG2_3.3.3 | SJ5.2 arc-90 93.31,36.97 R6.2 | SJ5.2 87.32,39.55 arc-90 82.55,44.32 82.55,45.21 arc90 81.28,46.48 79.93,46.48 arc-90 C19.1 78.74,46.51 | 78.74,46.51 77.47,46.51 | 77.47,46.51 76.1,46.51 arc90 MCP3208.16 | MCP3208.15 77.27,45.04 arc90 78.74,46.51 | 77.47,46.51 77.47,46.61
  Bottom 0.254: v68.92,47.72 66.77,47.72 arc90 64.97,45.93 64.97,46.57 64.68,46.57 arc-90 64.77,46.48 | v64.95,38.31 64.92,38.28 | 64.77,46.48 58.63,46.48 arc-90 v57.87,47.24 | 65.15,38.38 v64.95,38.31 | R6.2 89.33,35.56 arc90 88.44,34.66 v88.44,32.15 | v64.95,38.31 64.95,46.3 64.77,46.48
ADC
  Top 0.254: 89.92,10.89 ESP-12.10 arc-90 89.45,10.84 88.28,10.84 arc90 87.86,10.42 87.86,8.3 arc90 88.76,7.4 89.73,7.4 arc-90 91.24,5.9 91.24,5.37 arc-90 91.24,5.37 91.24,1.72 arc90 92.2,0.76 93.98,0.76 arc90 95.5,2.29 R40.1 R41.2
  Bottom 0.254: R40.1 C25.1 arc-90 C25.1
ADCSHUNT_A
  Top 0.254: MCP3208.1 65.38,46.31 arc-90 61.36,50.33 61.36,51.63 | 61.36,51.63 61.36,52.85 arc-90 SJ11.2 | U$6.P$1 61.36,51.63
ADCSHUNT_B  (via drill 0.5)
  Top 0.254: MCP3208.3 70.5,43.78 v69.35,43.78 | 61.85,27.94 arc90 SJ10.2 61.59,29.25 U$5.P$1
  Bottom 0.254: U$5.P$1 61.53,32.07 arc-90 63.5,34.04 63.88,34.04 arc90 66.29,36.45 66.29,42.2 arc-90 67.88,43.78 v69.35,43.78
BI_REF  (via drill 0.5)
  Top 0.254: 103.5,34.14 103.5,35.52 R6.1 R25.1 | 103.5,34.14 R7.2 R26.2 | 103.5,34.14 79.35,34.14 v78.34,35.16 78.05,35.16 arc90 76.95,36.26 73.37,36.26 arc-90 72.69,36.94 72.69,40.55 arc90 72.01,41.23 | v73.2,49.94 64.6,49.94 arc90 REF_SEL_A.3 | 72.01,41.23 72.89,41.23 arc90 73.37,41.72 v73.37,46.87 | v78.31,32.33 78.31,32.11 arc-90 77.97,31.77 74.12,31.77 arc90 71.39,29.04 71.39,28.52 arc-90 69.53,26.67 64.24,26.67 arc-90 REF_SEL_B.3 | 72.01,41.23 MCP3208.5
  Top 0.406: R6.1 arc-90 103.5,35.52
  Bottom 0.254: v73.37,46.87 73.37,49.77 arc90 v73.2,49.94 | v78.34,35.16 78.34,32.36 arc-90 v78.31,32.33
CH7  (via drill 0.5)
  Top 0.254: MCP3208.8 70.51,36.79 arc-90 v70.5,36.78
  Bottom 0.254: v70.5,36.78 70.5,35.61 arc90 J5.1
CH_PD
  Top 0.254: R17.1 92.76,15.9 88.17,15.9 arc90 87.84,15.57 87.84,13.53 arc90 88.48,12.89 ESP-12.11
D0/RX  (via drill 0.5)
  Top 0.254: ESP-12.8 74.6,8.89 arc90 85.41,19.7 85.41,26.36 arc90 UART.2 85.34,27.01 arc-90 87.05,28.73 88.62,28.73 arc-90 90.04,27.3 arc90 90.68,26.67 v102.61,26.66 | v105.79,26.8 arc90 109.73,30.86 109.73,43.61 arc-90 GPIO_1.7
  Bottom 0.254: v105.79,26.8 102.73,26.79 v102.61,26.66
D1/TX  (via drill 0.5)
  Top 0.254: R14.2 R15.1 | R15.1 arc-90 R15.1 | ESP-12.7 71.31,10.89 arc90 R15.1 | R15.1 arc90 70.76,10.34 70.76,8.62 arc90 71.71,7.66 85.39,7.66 | 85.47,7.66 85.39,7.66 | v97.75,13.29 98,13.54 98,18.47 arc-59 98.55,19.43 108.68,26.22 arc64 110.98,31.4 GPIO_1.9 | 85.39,7.66 arc90 v85.92,8.2
  Bottom 0.254: v85.92,8.2 arc90 86.38,7.85 89.38,7.85 arc90 91.44,9.91 91.44,10.16 arc-90 94.36,13.08 97.54,13.08 arc90 v97.75,13.29
GND  (via drill 0.5, 0.8, 3.3 pad 5.59)  (1 unrouted)
  other vias: 17.69,67.2 99.68,67.22 17.69,9.19 99.68,9.19 60.2,22.33 53.3,17.45 49.04,59.12 52.86,42.87 48.9,42.32 53.26,33.73 49.05,34.01 55.71,67.19 55.8,71.15 52.88,69.29 96.92,47.05 60.11,44.57 81.24,48.39 53.27,58.86 77.01,37.35 77.66,43.79 96.06,25.67 70.41,14.92 86.09,42.8 87.17,36.21 103.02,52.63 93.78,51.96 75.23,23.13 47.45,6.74 95.05,30.62 79.04,57.46 82.57,57.65 63.71,68.55 69.24,64.88 65.85,44.12 90.5,25.62 91.4,24.97 96.78,24.75 100.51,22.62 102.67,18.94 67.92,34.75 61.57,34.63 82.62,15.33 47.41,16.87 67.79,36.69 61.11,47.57 67.68,48.84 74.73,24.14
  pour Bottom (isolate 0.305, rank 3): 3.3,76.2 3.3,64.11 43.91,64.11 43.91,11.96 5.84,11.96 5.84,0.25 102.36,0.25 113.91,12.95 113.91,63.5 102.36,76.2
  pour Top (isolate 0.254, rank 3): 3.98,76.33 3.98,64.13 44.03,64.13 44.03,12.01 4.72,12.01 4.72,0.25 102.36,0.25 113.91,12.95 113.91,63.5 102.36,76.2
GPIO0  (via drill 0.5)
  Top 0.254: v70.35,16.84 73.25,16.84 arc90 ESP-12.4
  Bottom 0.254: BOOT.2 arc90 67.76,16.84 v70.35,16.84
GPIO2  (via drill 0.5)
  Top 0.254: MCP3208.10 78.05,38.69 arc-90 v79.93,36.82 | v79.81,32.38 79.81,30.3 arc90 79,29.48 79,24.58 arc-90 ESP-12.3
  Bottom 0.254: v79.93,36.82 79.93,32.5 arc-90 v79.81,32.38
GPIO12  (via drill 0.5)
  Top 0.254: R9.2 81.63,40.13 R10.1 81.63,40.22 arc-90 v81.74,40.34 | v91,27.56 arc90 88.16,30.77 83.79,30.77 arc90 v83.72,30.7 | v91.43,18.89 ESP-12.14 arc90 ESP-12.14 87.68,18.89 arc90 86.62,17.83 84.24,12.39 v84.24,11.51 | MICRO_SD.PIN7 51.24,4.69 52.94,6.39 71.26,6.39 arc90 v71.35,6.47
  Bottom 0.254: v91.43,18.89 arc90 92.3,19.76 92.3,26.45 arc90 91.09,27.67 v91,27.56 | v71.35,6.47 71.35,6.79 arc-90 72.24,7.68 80.41,7.68 arc90 v84.24,11.51 | v83.72,30.7 arc-90 82.3,32.13 82.3,39.78 arc90 v81.74,40.34
GPIO12A
  Top 0.254: R9.1 78.83,41.23 MCP3208.12
GPIO13  (via drill 0.5)
  Top 0.254: MCP3208.11 78.76,39.96 arc-90 v79.99,38.73 | v82.82,29.42 82.86,29.42 arc-90 84.05,28.23 84.05,21.21 arc90 v84.32,20.94 | v91.24,21 89.61,21 arc90 ESP-12.15 | MICRO_SD.PIN3 59.81,9.09 arc90 64,13.28 64,13.46 arc-90 66.02,15.48 66.62,15.48 arc90 67.74,16.6 v67.74,17.75 | v75.62,17.71 77.26,17.71 arc90 v80.5,20.94
  Bottom 0.254: 80.02,38.73 v79.99,38.73 80.39,38.73 arc-90 81.15,37.97 81.15,31.09 arc90 v82.82,29.42 | v91.24,21 arc-90 91.18,20.94 v84.32,20.94 v80.5,20.94 | v75.62,17.71 75.58,17.75 v67.74,17.75
GPIO14  (via drill 0.5)
  Top 0.254: MCP3208.13 80.36,42.5 arc-90 83.33,39.53 v83.33,36.96 | v85.18,29.93 arc90 85.4,29.71 v88.14,29.71 | v91.52,16.98 arc-90 91.43,16.89 ESP-12.13 arc-90 89.41,16.8 88.95,16.8 arc90 85.98,13.83 85.98,13.73 arc-90 80.75,8.5 v79.38,8.5 | v70.25,7.24 arc-90 70.21,7.19 49.88,7.19 49.58,6.89 MICRO_SD.PIN5
  Bottom 0.254: v83.33,36.96 83.33,33.19 arc90 83.31,33.17 83.31,32.64 arc90 84.07,31.88 84.2,31.88 arc-90 85.18,30.9 v85.18,29.93 85.18,30.95 | v88.14,29.71 arc90 88.93,28.93 90.47,28.93 arc-90 93,26.4 93,18.36 arc-90 91.62,16.98 v91.52,16.98 | v79.38,8.5 arc-90 79.14,8.26 71.09,8.26 arc90 v70.25,7.24
GPIO15
  Top 0.254: ESP-12.2 70.8,20.89 arc90 R11.1 70.77,21.44 arc90 69.06,23.14 66.69,23.14 arc90 63.38,19.84 63.38,13.14 arc-90 60.4,10.16 49.02,10.16 arc90 MICRO_SD.PIN2
GPIO16
  Top 0.254: 89.04,14.42 arc90 ESP-12.12 | 90.17,15.11 arc143 ESP-12.12 | 90.17,14.89 ESP-12.12 | SJ12.1 92.97,13.37 arc90 91.57,14.77 89.62,14.77 arc-90 ESP-12.12
LOAD-NEG-A
  Top 0.254: F2.1 32.76,56.05
  Top 0.61: 32.76,56.05 EBW_B.P$2
  pour Top (no thermals): 0.35,62.72 37.16,62.72 37.16,51.72 0.35,51.72
  pour Bottom (isolate 0.813, no thermals): 37.16,62.72 0.35,62.72 0.35,51.72 37.16,51.72
LOAD-NEG-A_T
  Top 0.254: 51.18,52.97 51.69,52.97 54.07,52.97 | 54.07,52.97 54.78,52.97 | 54.78,52.97 56.8,52.97 | C2.1 54.07,52.97 | 54.78,52.97 54.78,53.87 arc-90 54.75,53.91 C1.1 | D2.C 51.18,52.97 | F2.2 51.18,52.97
  Top 0.406: 56.8,52.97 SHUNTMON-A.8 | F2.2 46.74,55.91 | 51.64,53.02 arc-90 51.69,52.97
LOAD-NEG-B
  Top 0.254: F4.1 34.01,30.65
  Top 0.61: 34.01,30.65 EBW_A.P$26
  pour Top (no thermals): 0.35,37.22 37.16,37.22 37.16,26.22 0.35,26.22
  pour Bottom (isolate 0.813, no thermals): 37.16,37.22 0.35,37.22 0.35,26.22 37.16,26.22
LOAD-NEG-B_T
  Top 0.254: 54.05,27.47 54.59,27.47 | 54.59,27.47 56.8,27.47 | C5.1 54.05,27.47 | 54.05,27.47 51.73,27.47 | C4.1 54.56,27.5 arc90 54.59,27.47 | F4.2 51.19,27.47
  Top 0.406: 56.8,27.47 SHUNTMON-B.8 | 51.01,27.64 51.19,27.47 51.73,27.47 arc90 51.55,27.64 | F4.2 46.74,30.39
  Top 0.61: 51.01,27.64 | 51.01,27.64 D4.C
N$1
  Top 0.254: C18.1 arc90 92.6,21.89 87.86,21.89 arc-90 87.63,22.12 87.63,26.16 arc90 87.88,26.41 UART.1
N$5
  Top 0.254: R5.1 110.68,57.23 SJ13.1
N$6
  Top 0.254: LED1.A 109.29,59.48 SJ13.2
N$10
  Top 0.254: SHUNTMON-B.5 60.01,27.63 arc90 SJ10.1
N$11
  Top 0.254: SJ11.1 58.8,53.09 arc-90 SHUNTMON-A.5
N$36
  Top 0.254: R14.1 arc-90 70.41,13.9 76.33,13.9 arc90 82.8,20.36 UART.3
N$44
  Bottom 0.254: Y1.P$4 67.58,13.02 68.87,13.02 PCF8523.2 arc-90 PCF8523.2
N$45
  Bottom 0.254: 68.78,11.75 PCF8523.1 68.83,11.49 65.7,8.36 Y1.P$1
REF_A_INPUT
  Top 0.254: REF_SEL_A.2 63.33,52.09 arc-90 62.61,52.8 62.61,54.48 arc90 61.81,55.28 C7.1 arc-90 61.39,55.08 58.03,55.08 | 58.03,55.08 arc90 57.47,54.52 57.47,53.14 arc-90 SHUNTMON-A.7 | SHUNTMON-A.6 58.11,55.01 arc90 58.03,55.08
REF_B_INPUT  (via drill 0.5)
  Top 0.254: 58.12,29.24 v58.39,29.24 arc90 58.42,29.27 C8.1 | 58.12,29.24 57.93,29.24 arc90 57.45,28.76 SHUNTMON-B.7 arc90 SHUNTMON-B.7 | SHUNTMON-B.6 58.11,29.22 arc-90 58.12,29.24
  Bottom 0.254: REF_SEL_B.2 64.6,29.24 arc-90 66.24,27.6 66.24,26.88 arc-90 63.9,24.54 61.12,24.54 arc-90 58.36,27.3 58.36,29.21 arc-90 v58.39,29.24
RST  (via drill 0.5)
  Top 0.254: ESP-12.9 arc90 89.52,8.88 92.04,8.88 arc90 SJ12.2 92.97,9.74 arc-90 93,9.78 94.29,9.78 arc90 94.68,10.17 R16.1 arc-90 94.64,14.88 v93.54,14.92 | RESET.1 100.25,14.91 arc90 v99.09,13.63 | C18.2 93.49,19.24 arc-90 v94.18,18.55
  Bottom 0.254: v94.18,18.55 94.18,14.99 arc-90 v93.54,14.92 97.55,14.89 arc-90 v99.09,13.63
SCL  (via drill 0.5)  (1 unrouted)
  Top 0.254: v75.69,12.95 73.37,12.95 arc90 ESP-12.6
  Bottom 0.254: PCF8523.6 74.01,14.13 | 64.51,1.33 SV2.2 64.49,3.82 | PCF8523.6 74.39,14.25 arc-90 v75.69,12.95 | SV1.2 66.47,5.85 67.17,5.85 68.66,7.34 68.66,8.51 68.98,9.1 73.16,13.94 PCF8523.6
SDA  (via drill 0.5)  (1 unrouted)
  Top 0.254: ESP-12.5 arc-90 73.51,15.1 v75.53,15.1
  Bottom 0.254: v75.53,15.1 arc90 75.07,15.55 PCF8523.5 73.23,15.13 70.3,11.74 | 70.38,11.81 70.3,11.74 | 70.3,11.74 67.99,9.42 67.99,7.83 66.67,6.51 64.5,6.51 61.95,3.97 SV2.1
SOURCE-POS-A
  Top 0.254: F3.1 29.89,45.89
  Top 0.61: 29.89,45.89 29.84,45.85
  pour Top (no thermals): 0.35,50.22 37.16,50.22 37.16,39.22 0.35,39.22
  pour Bottom (isolate 0.813, no thermals): 37.16,50.22 0.35,50.22 0.35,39.22 37.16,39.22
SOURCE-POS-A_T
  Top 0.254: 54.07,48.97 51.69,48.97 51.18,48.97 F3.2 | 54.07,48.97 54.78,48.97 56.8,48.97 | C2.2 54.07,48.97 | SHUNTMON-A.1 56.8,46.01 arc-90 56.26,45.47 56.01,45.47 arc90 55.91,45.37 arc-90 55.84,45.44 R1.1
  Top 0.305: D3.C 51.18,48.97
  Top 0.406: C3.1 54.78,48.09 54.78,48.97 | 56.8,48.68 SHUNTMON-A.1 56.8,48.97 | F3.2 46.74,46 | 51.68,48.97 arc90 51.69,48.97
SOURCE-POS-B
  Top 0.254: F5.1 31.8,20.49
  Top 0.61: 31.8,20.49 31.75,20.45
  Bottom 1.016: EBW_A.P$5 35.18,21.72
  pour Top (no thermals): 0.35,24.72 37.16,24.72 37.16,13.72 0.35,13.72
  pour Bottom (isolate 0.813, no thermals): 37.16,24.72 0.35,24.72 0.35,13.72 37.16,13.72
SOURCE-POS-B_T
  Top 0.254: 54.05,23.47 51.69,23.47 51.18,23.47 F5.2 | 54.53,23.47 56.8,23.47 | C5.2 54.05,23.47 | 54.05,23.47 54.53,23.47 | 54.53,23.47 C6.1 | 58.76,18.74 arc-90 R3.1 57.92,18.85 arc-90 56.79,19.98 56.79,23.3 arc-90 SHUNTMON-B.1
  Top 0.305: D5.C 51.18,23.47
  Top 0.406: 56.8,23.47 SHUNTMON-B.1 | F5.2 46.74,20.63 | 51.63,23.52 arc-90 51.69,23.47
UNI_REF  (via drill 0.5)
  Top 0.254: R7.1 90.15,32.26 89.01,33.4 85.07,33.4 v84.84,33.26 84.95,33.4 78.04,33.4 arc-90 77.07,34.37 77.07,34.69 arc90 76.06,35.7 72.81,35.7 arc-90 72.77,35.73 72.65,35.73 arc-90 72.01,36.38 | 72.01,36.38 72.01,39.39 arc90 71.45,39.95 70.52,39.95 MCP3208.6 | 64.9,54.73 64.31,54.73 arc90 REF_SEL_A.1 64.8,54.63 arc90 64.9,54.73 | REF_SEL_B.1 66.94,31.78 arc90 69.63,34.47 69.63,34.81 arc-90 70.5,35.68 71.3,35.68 arc90 72.01,36.38 | R7.1 R8.2 R27.2 | 97.66,32.21 arc90 R26.1 R7.1 | 64.9,54.73 arc90 68.19,51.44 77.34,51.44 arc-90 84.54,44.24 v84.54,41.95
  Bottom 0.254: v84.84,33.26 arc-90 84.52,33.57 84.52,41.94 v84.54,41.95
V_IN_POSTFUSE
  Top 0.813: 58.42,72.75 U$2.P$1 58.14,71.88 arc-90 57.85,72.17 57.85,73.86 arc-90 U$2.P$2 58.42,72.75 | 56.35,72.87 arc90 56.47,72.75 58.42,72.75
  Top 1.016: F1.P$3 48.43,72.87 | 48.43,72.87 49.53,72.87 | 49.53,72.87 56.35,72.87 56.87,72.87 arc90 U$2.P$2 | D1.C 48.82,72.16 arc-90 49.53,72.87 | D1.C arc-90 48.43,70.83 48.43,72.87 | D1.C arc90 49.36,70.99 49.36,72.82
  Bottom 1.27: F1.P$4 F1.P$3
V_IN_PREFUSE  (via drill 0.5)  (1 unrouted)
  Top 0.254: SJ7.2 39.06,19.03 arc90 v39.04,19.05
  Bottom 1.016: F1.P$1 F1.P$2 arc-90 39.09,63.09 SJ1.2 39.06,61.43 SJ3.1 39.06,36.02 v38.92,35.88 39.04,35.76 v39.04,19.05
  other vias: 39.06,40.51 39.09,61.46
VBAT  (via drill 0.5)
  Top 0.254: v57.66,11.62 56.07,11.62 arc-90 55.75,11.94 55.75,18.86 v55.74,18.88
  Bottom 0.254: 68.74,14.34 arc-90 68.78,14.31 68.77,14.29 68.79,14.29 PCF8523.3 66.1,14.25 arc90 63.27,11.42 63.27,10.7 arc-90 62.1,9.53 59.75,9.53 arc-90 v57.66,11.62 | v55.74,18.88 55.74,18.96 arc90 Q1.2 52.46,20.4 arc90 CR1220.P+
VCC_ACS_A
  Top 0.254: U$17.P$1 IC1.1
VCC_ACS_B
  Top 0.254: U$15.P$1 IC2.1
VDD_PCF
  Bottom 0.254: PCF8523.8 76.18,11.75 arc90 C33.1 79.42,13.39 arc90 R22.1
VDD_RTC_POSTJUMPER
  Bottom 0.254: 81.54,14.04 R22.2 81.76,14.25 arc90 80.01,16 arc-90 77.96,18.05 SJ2.2 arc90 77.63,19.71
VOUT_ACS_A
  Top 0.254: IC1.3 U$16.P$1
VOUT_ACS_B
  Top 0.254: U$14.P$1 IC2.3
VOUT_POST_SWITCHING
  Top 0.813: U$10.P$2 U$10.P$1
  Top 1.016: SJ4.1 arc-90 SJ4.1 arc90 87.39,55.97 87.39,69.43 arc-90 92.39,74.42 U$10.P$2
VSENSE_A
  Top 0.254: 58.06,41.18 arc90 SJ8.1 56.52,41.54 arc90 R1.2 arc90 55.65,40.67 55.65,40.3 arc-90 54.99,39.64 54.94,39.64 arc90 54.46,39.16 54.46,37.96
  Top 0.406: 54.46,37.96 arc-90 R2.2
VSENSE_A_BUFFED  (via drill 0.8)
  Top 0.152: v67.69,45.09 66.08,45.09 66.04,45.04
  Top 0.254: LM258.2 LM258.1 arc-90 65.64,45.04 66.04,45.04 MCP3208.2 71.27,45.04 arc-90 71.27,45.04
VSENSE_A_TP
  Top 0.254: LM258.3 arc-90 61.59,43.63 61.59,44.58 arc90 60.58,45.59 58.67,45.59 arc90 U$1.P$1 58.29,43.19 arc-90 SJ8.2
  Bottom 0.254: U$1.P$1 58.29,44.03 C21.1
VSENSE_B
  Top 0.254: SJ9.1 58.83,16.49 R3.2 58.65,14.34 arc90 R4.2 arc-90 58.92,14.07
VSENSE_B_BUFFED  (via drill 0.8)
  Top 0.254: LM258.6 LM258.7 | 62.93,38.37 arc90 LM258.7 | 67.75,42.32 70.33,42.32 MCP3208.4 arc-90 MCP3208.4 71.41,42.51 | 67.75,42.32 67.53,42.32 arc90 62.94,37.73 62.94,38.35 LM258.7 | v67.75,41.35 67.75,42.32
VSENSE_B_TP  (via drill 0.5)
  Top 0.254: SJ9.2 61.32,19.83 U$4.P$1 61.54,21.15 arc90 62.19,21.81 62.19,25.37 v62.04,25.51 | LM258.5 arc90 60.33,38.34 60.33,31.88 60.37,31.88 v60.4,31.85
  Bottom 0.254: v60.4,31.85 59.41,31.85 arc90 C20.1 59.33,31.6 arc90 59.56,31.37 59.56,28 arc90 v62.04,25.51

## Text on the board
bPlace: emonDC | wireless energy monitoring node | Technology that helps us live within ecological limits | Lead free PCB - RoHS components | OpenEnergyMonitor.org | Designed in / North Wales / by Daniel Bates | Open / Hardware
tNames: +IN | DC-DC Buck Regulator / Set to 6.5V | +OUT | 5x20 | GND | 5V | GND | 5V_IN | ***PREPARE FOR*** / HIGH FLOATING / VOLTAGES! | PWR_ON | 2 | Vout | UNI | A | A | Vcc | BI | A | 1 | RFM69Pi | B | TR5 / FUSES | 2 | UNI | CH7 | GND | BI | Vout | B | GND | UNI | 5V | Tx | Rx | RST | B | BI | Vcc | 1 | v4.1 APR 2019 by DB | Wireless Energy / Monitoring Node | GND | GND | SCL | GND | emonDC / _duo_ | SDA | 3V3 | I2C | GND | 3.3V | 5.08mm | 1V
_tsilk: Designed in | North Wales | Made in UK
_bsilk: SMT V0.6 rev3 | emonTx | wireless energy monitoring node | SMT V0.6 rev3 | emonTx | SMT V0.6 rev3 | emonTx | Technology that helps us live within ecological limits | wireless energy monitoring node | wireless energy monitoring node | Designed in North Wales UK by Glyn Hudson & Trystan Lea | Technology that helps us live within ecological limits | Technology that helps us live within ecological limits | Designed in North Wales UK by Glyn Hudson & Trystan Lea | 165mm ant | 433Mhz | Designed in North Wales UK by Glyn Hudson & Trystan Lea | 165mm ant | 165mm ant | 433Mhz | 433Mhz | 868Mhz | 82mm ant | 82mm ant | 82mm ant | 868Mhz | 868Mhz | 78mm ant | 915Mhz | 78mm ant | 915Mhz | 78mm ant | 915Mhz | 165mm ant | 433Mhz | 82mm ant | 868Mhz | 78mm ant | 915Mhz